# Altium PCB raumluftsensor.PcbDoc
Units mil, origin at the board's own origin, x right, y up, seen from the top; angles counter-clockwise.
Board outline 1850 x 1000 mil, 2 copper layers (Top Layer, Bottom Layer); 3 components, 4 nets, 26 pads, 0 vias.
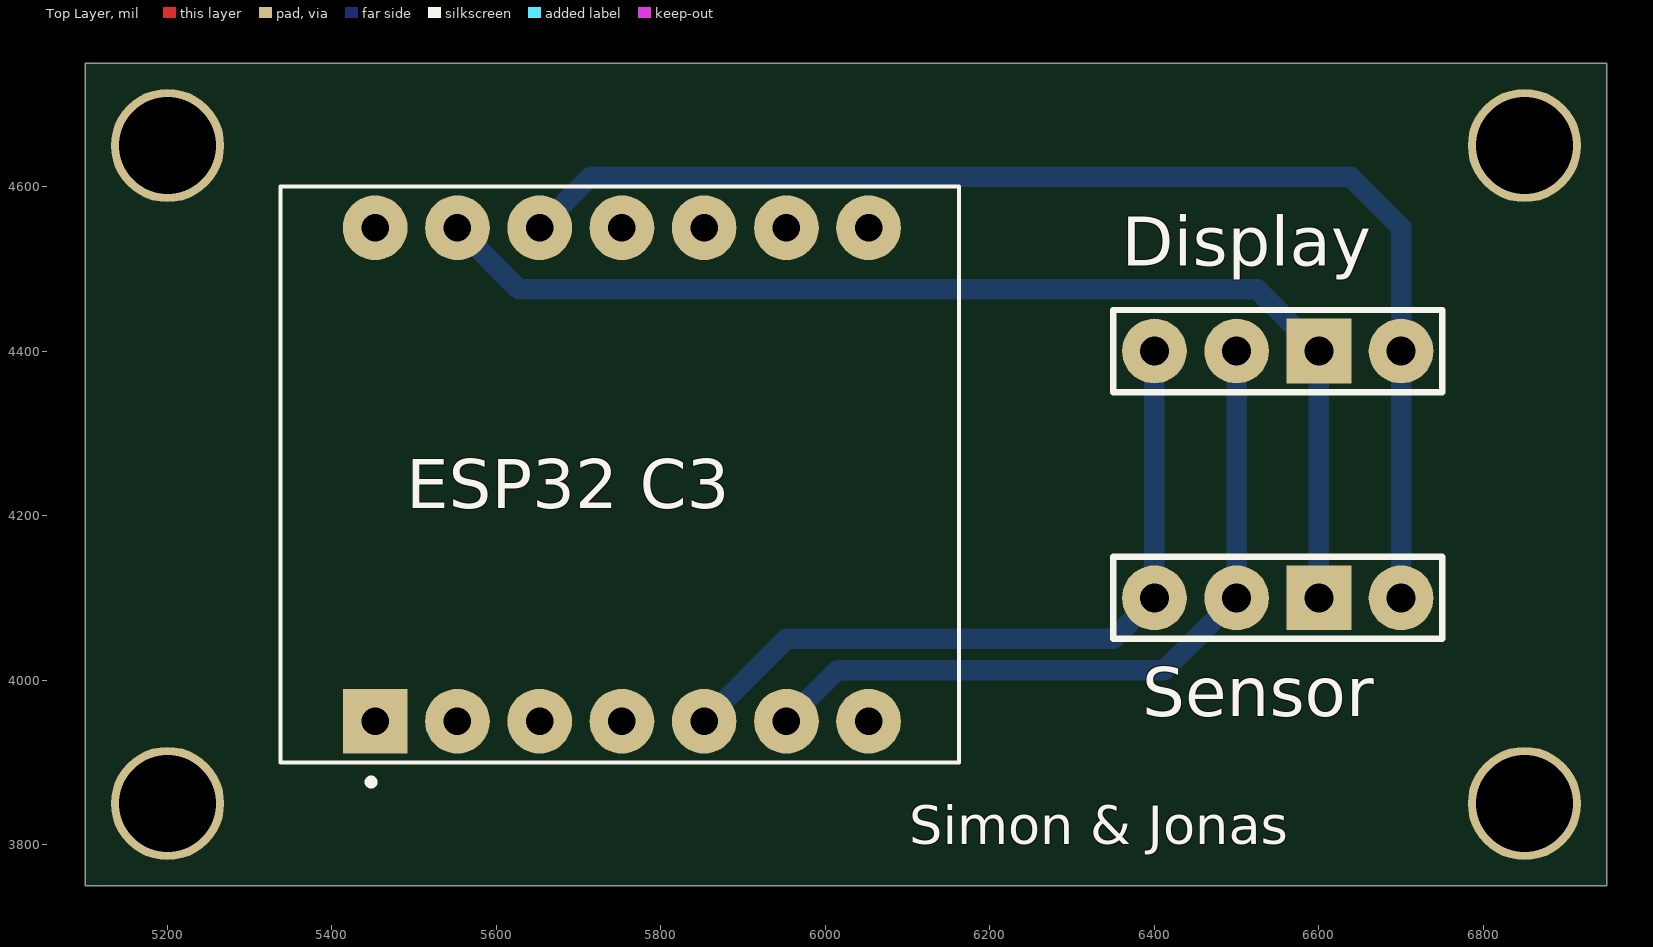
[diagram p0: Top Layer view]
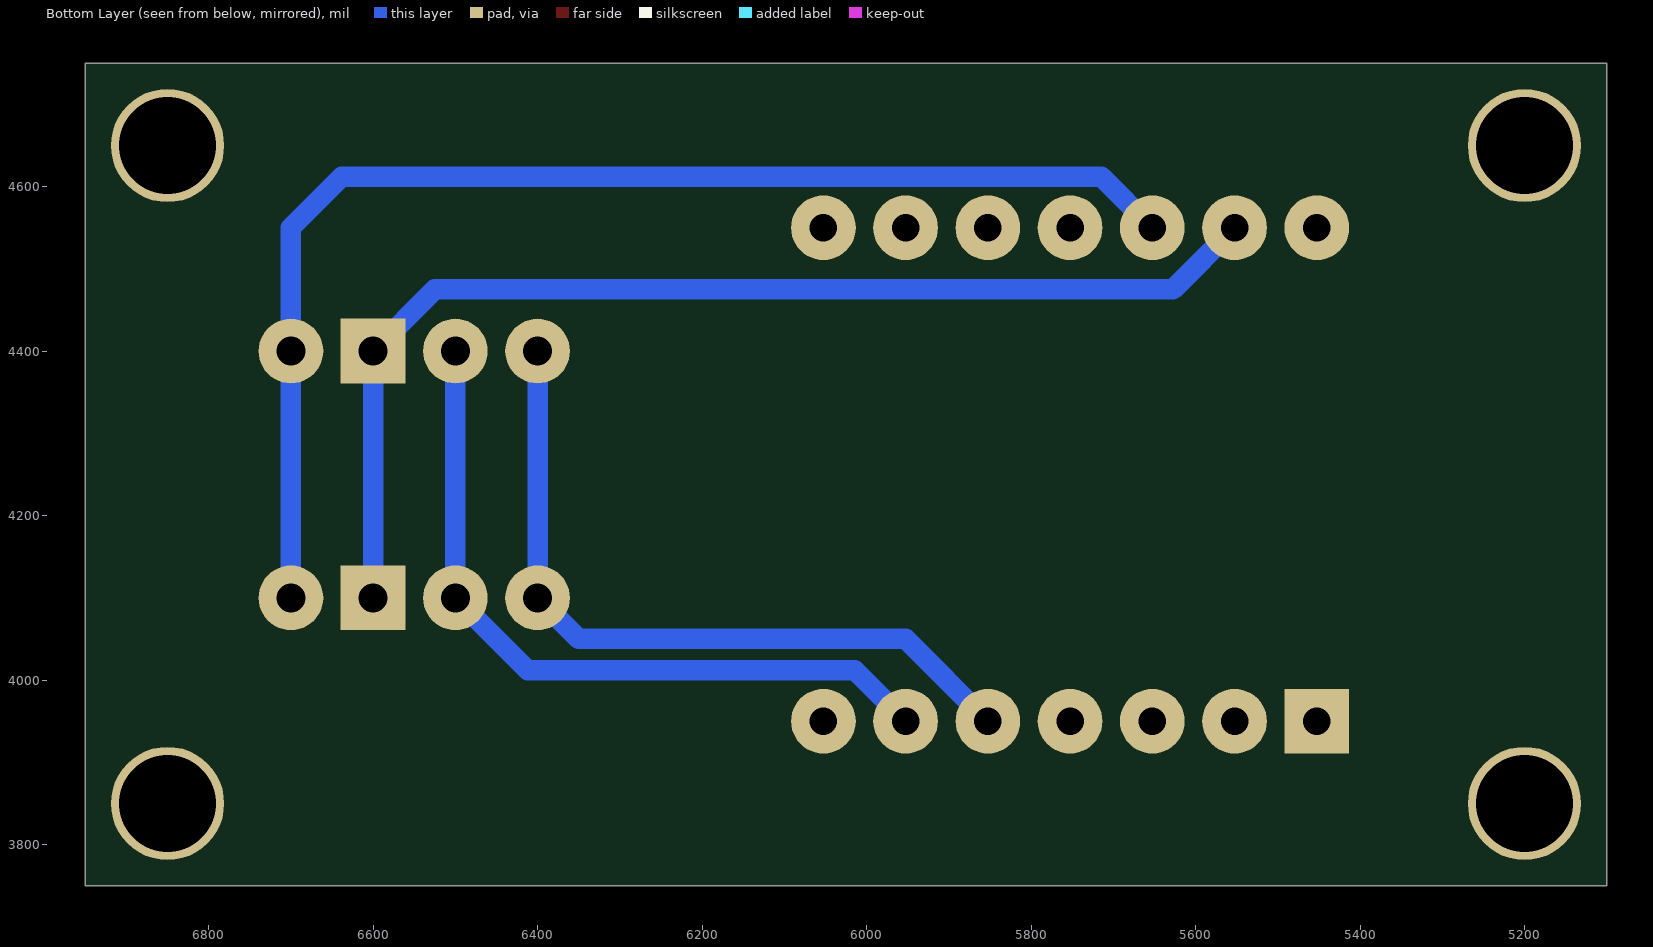
[diagram p1: Bottom Layer view, seen from below]

## Layer stack, top to bottom
Top Solder: solder mask 0.4, Solder Resist, Dk 3.5
Top Layer: signal copper 1.4
Dielectric1: dielectric 12.6, FR-4, Dk 4.8
Bottom Layer: signal copper 1.4
Bottom Solder: solder mask 0.4, Solder Resist, Dk 3.5

## Board outline
5100,3750 6950,3750 6950,4750 5100,4750

## Design rules (kind name [scope] priority, off if disabled: settings)
Clearance "Text (Polygon)" [inPolygon vs isText] p1: gap=0 ignorepadtopadclearanceinfootprint=FALSE
Clearance "Masseflaeche (Polygon)" [All vs inPolygon] p2: gap=20 ignorepadtopadclearanceinfootprint=FALSE except(0: Arc-Hole Track-Hole SMDPad-Hole THPad-Hole Via-Hole Fill-Hole Poly-Hole Region-Hole Text-Hole)
Clearance "Abstand (Clearance)" [All] p3: gap=10 ignorepadtopadclearanceinfootprint=FALSE except(0: Arc-Hole Track-Hole SMDPad-Hole THPad-Hole Via-Hole Fill-Hole Poly-Hole Region-Hole Text-Hole)
DiffPairsRouting [All] p1: maxlimit=15 minlimit=12 mostfreqgap=12 toplayer_minwidth=15 toplayer_maxwidth=15 toplayer_prefwidth=15 bottomlayer_minwidth=15 bottomlayer_maxwidth=15 bottomlayer_prefwidth=15 maxuncoupledlength=500
FabricationTestPointUsage TestPointUsage [All] p1: valid=0 allowmultiple=FALSE
FabricationTestpoint Testpoint [All] p1: side=3 testpointundercomponent=TRUE minsize=40 maxsize=100 preferedsize=60 minholesize=0 maxholesize=40 preferedholesize=32 testpointgrid=1 allowsidetop=TRUE allowsidebottom=TRUE usegrid=TRUE gridtolerance=0.01
HoleSize [All] p1: absolutevalues=TRUE maxlimit=100 minlimit=28 maxpercent=80.000 minpercent=20.000
HoleToHoleClearance [All] p1: gap=10 allowstackedmicrovias=FALSE
PlaneConnect [All] p1: planeconnectstyle=Relief reliefexpansion=20 reliefentries=4 reliefconductorwidth=32 reliefairgap=10
PolygonConnect [All] p1: connectstyle=Relief reliefconductorwidth=32 reliefentries=4 polygonreliefangle="90 Angle" airgapwidth=10
RoomDefinition raumluftsensor [InComponentClass('raumluftsensor')] p1: confinementstyle=ConfineIn formatcopy=TRUE lockcomponents=FALSE outline 2600,2100 8600,2100 8600,6100 2600,6100
RoutingVias [All] p1: holewidth=28 width=50 viastyle="Through Hole" minholewidth=28 minwidth=50 maxholewidth=28 maxwidth=50
SMDEntry [All] p1: side=TRUE corner=TRUE anyangle=FALSE
SilkToSilkClearance [All] p1 off: silktosilkclearance=10
SilkToSolderMaskClearance SilkscreenOverComponentPads [IsPad] p1 off: minsilkscreentomaskgap=10 clearancetoexposedcopper=TRUE
SolderMaskExpansion [All] p1: expansion=4 istentingtop=FALSE
UnRoutedNet [All] p1: checkbadconnections=TRUE
Width [All] p1: maxlimit=200 minlimit=11 preferedwidth=25 minimp=50.000000 maximp=50.000000 favimp=50.000000
21 further rules are at their usual default settings.

## Components (designator, comment, footprint, x,y, rotation, side; value= is the part's Value field where it differs from the comment)
Display "Header 4" HDR1X4 6400,4400 r0 top
"ESP32 C3" "113991054" MODULE_113991054 5750,4250 r90 top
Sensor "Header 4" HDR1X4 6400,4100 r0 top

## Footprints (in the part's own frame and the unit in brackets; to place one, negate y for a bottom-side part, rotate by r counter-clockwise, add the part's x,y. Pads: shape width x height; smd on the part's side, far side on the other; paste and mask are expansions set on the pad)
HDR1X4 [mm] "Connector; Header; 4 Position"
  round 2 hole 0.9: 1(0,0) 2(2.54,0) 4(7.62,0)
  rect 2x2 hole 0.9: 3(5.08,0)
  silkscreen extent -1.27,-1.27 8.89,1.27
MODULE_113991054 [mm]
  rect 2x2 hole 0.85: 1(-7.62,7.556)
  round 2 hole 0.85: 2(-7.62,5.016) 3(-7.62,2.476) 4(-7.62,-0.064) 5(-7.62,-2.604) 6(-7.62,-5.144) 7(-7.62,-7.683) 8(7.62,-7.683) 9(7.62,-5.143) 10(7.62,-2.603) 11(7.62,-0.063) 12(7.62,2.477) 13(7.62,5.017) 14(7.62,7.556)
  silkscreen extent -9.6,-10.48 8.89,10.48, body extent -8.89,-10.48 8.89,11.99, height 4.21

## Part data
Display Sensor: "Header, 4-Pin", LatestRevisionDate=17-Jul-2002, LatestRevisionNote="Re-released for DXP Platform.", Publisher="Altium Limited"
"ESP32 C3": "- ESP32-C3 Transceiver; 802.11 a/b/g/n (Wi-Fi, WiFi, WLAN), BluetoothÂ® Smart 4.x Low Energy (BLE) 2.4GHz Evaluation Board", Package=None, Check_prices=https://www.snapeda.com/parts/113991054/Seeed+Studio/view-part/?ref=eda, MF="Seeed Technology Co., Ltd", MP=113991054, SnapEDA_Link=https://www.snapeda.com/parts/113991054/Seeed+Studio/view-part/?ref=snap

## Free pads (board coordinates)
  round 137.8 hole 118.11: 1(5200,4650) 2(5200,3850) 3(6850,3850) 4(6850,4650)

## Nets (pads, with @x,y where several pads share a name; then routed paths per layer and width w, separated by ;. In a path a pad name is that pad's centre, name@x,y a point inside that pad or via, vN(x,y) a via of type N, cw(c..) or ccw(c..) an arc to the next point about the centre after c; other vN are vias at no path point)
GND: "ESP32 C3.13" Display.3 Sensor.3 | length 1409.6
  Bottom Layer w25: 5552.5,4550 5627.5,4475 6525,4475 Display.3 Sensor.3
SCL: "ESP32 C3.6" Display.2 Sensor.2 | length 909.6
  Bottom Layer w25: 5952.5,3950 6014.37,4011.87 6411.87,4011.87 Sensor.2 Display.2
SDA: "ESP32 C3.5" Display.1 Sensor.1 | length 909.6
  Bottom Layer w25: 5852.5,3950 5952.5,4050 6350,4050 Sensor.1 Display.1
VCC: "ESP32 C3.12" Display.4 Sensor.4 | length 1548.8
  Bottom Layer w25: 5652.5,4550 5714.37,4611.87 6638.13,4611.87 6700,4550 Display.4 Sensor.4
pads on no net: "ESP32 C3.1" "ESP32 C3.2" "ESP32 C3.3" "ESP32 C3.4" "ESP32 C3.7" "ESP32 C3.8" "ESP32 C3.9" "ESP32 C3.10" "ESP32 C3.11" "ESP32 C3.14"

## Other copper
Top Layer:
  text "LAYOUT TOP" at 10300,880 h70
  text "2" at 10300,280 h70
Bottom Layer:
  text "LAYOUT BOTTOM" at 10300,880 h70
  text "3" at 10300,280 h70

## Silkscreen, mask and mechanical layers (free items; w line width, h text height)
Top Overlay:
  text "Simon & Jonas" at 6101.78,3784.81 h80
  text "BESTUECK. TOP" at 10300,880 h70
  text "4" at 10300,280 h70
Bottom Overlay:
  text "BESTUECK. BOTTOM" at 10300,880 h70
  text "5" at 10300,280 h70
Mechanical 4 (Printumriss):
  the board outline again, w10
Mechanical 16 (Blatt-Beschriftung):
  drawing of 350 lines, arcs and shapes, not listed
  text "1" at 1427,7465 h70
  text "2" at 4287,7465 h70
  text "3" at 7167,7465 h70
  text "4" at 10037,7465 h70
  text "A" at 75,6559 h70
  text "A" at 11375,6559 h70
  text "B" at 75,4667 h70
  text "B" at 11375,4667 h70
  text "C" at 75,2757 h70
  text "C" at 11375,2757 h70
  text "TITEL:" at 6850,1300 h45
  text "PROJEKTNAME" at 6900,1180 h70
  text "NAME:" at 6850,1000 h45
  text "GRUPPE:" at 8350,1000 h45
  text "KLASSE:" at 9180,1000 h45
  text "DOKUMENTENART:" at 10250,1000 h45
  text "MAX MUSTERMANN" at 6900,880 h70
  text "I" at 8400,880 h70
  text "KLASSE" at 9230,880 h70
  text "D" at 75,867 h70
  text "D" at 11375,867 h70
  text "DATUM:" at 6850,700 h45
  text "REVISION:" at 8350,700 h45
  text "MASZSTAB:" at 9180,700 h45
  text "DOKUMENTENSTATUS:" at 10250,700 h45
  text "HTBLVA" at 5550,600 h70
  text ".PRINT_DATE" at 6900,580 h70
  text "0.1" at 8400,580 h70
  text ".Print_Scale" at 9230,580 h70
  text "ENTWURF" at 10300,580 h70
  text "Abt. Elektronik" at 5550,500 h70
  text "Anichstrasse 26-28" at 5550,400 h70
  text "SACHNUMMER/DATEINAME:" at 6850,400 h45
  text "BLATT:" at 10250,400 h45
  text "BLAETTER:" at 10800,400 h45
  text "A-6020 Innsbruck" at 5550,300 h70
  text ".PCB_FILE_NAME_NO_PATH" at 6900,280 h70
  text "6" at 10850,280 h70
  text "1" at 1427,65 h70
  text "2" at 4287,65 h70
  text "3" at 7167,65 h70
  text "4" at 10037,65 h70
Drill Drawing:
  text ".LEGEND" at 4700,1800 h60
  text "BOHRPLAN" at 10300,880 h70
  text "6" at 10300,280 h70